# Altium PCB PCB.PcbDoc (part 2 of 2)
Units mm, origin at the board's own origin, x right, y up, seen from the top; angles counter-clockwise.
Board outline 100 x 50 mm, 4 copper layers (Top Layer, Vdd, GND, Bottom Layer), stack 0.603 mm thick; 115 components, 77 nets, 418 pads, 251 vias.
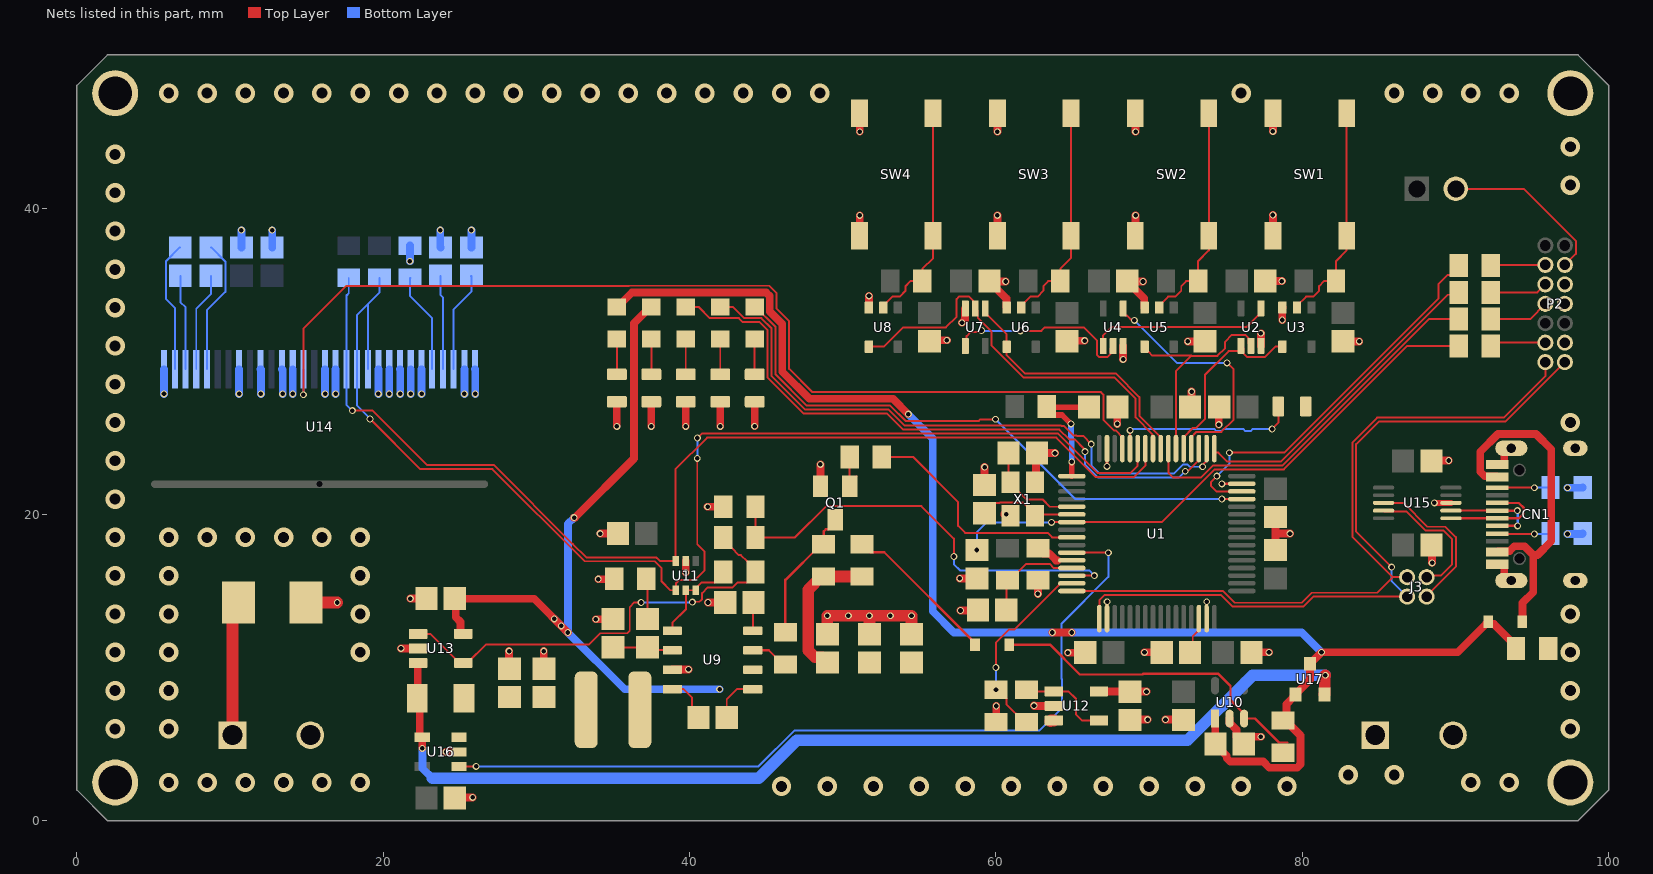
[diagram p4: the nets of this part, all layers, seen from the top]

## Via types
v1: diameter 0.45, hole 0.3, Top Layer to Bottom Layer, 169 vias
v2: diameter 1.27, hole 0.711, Top Layer to Bottom Layer, 82 vias

## Nets (pads, with @x,y where several pads share a name; then routed paths per layer and width w, separated by ;. In a path a pad name is that pad's centre, name@x,y a point inside that pad or via, vN(x,y) a via of type N, cw(c..) or ccw(c..) an arc to the next point about the centre after c; other vN are vias at no path point) (continued)
+12: C29.1 C30.1 C31.1 C41.1 C42.1 J2.1 LED3.2 R23.2 R37.1 U9.2 U12.3 U12.5 U13.5 U17.2 | length 59.9
  Top Layer w0.508: U13.5@25.225,12.2 25.116,12.2 25.045,12.271 25.045,12.978 24.738,13.286 24.738,14.437 C42.1@24.675,14.5 29.848,14.5 v1(32.055,12.294) ; v1(32.461,19.787) 32.512,19.787 36.373,23.647 36.373,32.473 37.45,33.55 LED3.2@37.5,33.55 ; U12.5@66.725,8.45 66.737,8.438 68.737,8.438 68.742,8.433 v1(69.825,8.433)
  Top Layer w0.762: C29.1@49,10.325 48.656,10.669 48.188,10.669 47.742,11.115 47.742,15.092 48.6,15.95 R23.2@48.75,15.95 R37.1@51.25,15.95 ; U12.3@63.556,6.494 63.612,6.55 U12.3@63.775,6.55
  Bottom Layer w0.508: v1(31.162,13.183) 31.166,13.183 v1(31.623,12.725) v1(32.055,12.294) ; v1(32.461,19.787) 32.055,19.38 v1(32.055,12.294) ; v1(41.961,8.585) 35.763,8.585 v1(32.055,12.294)
  other v2: 46,2.25 49,2.25 52,2.25 55,2.25 58,2.25 61,2.25 64,2.25 67,2.25 70,2.25 73,2.25 76,2.25 79,2.25 83,3 86,3
AGND: R7.1 U1.12 | length 1.6
  Top Layer w0.508: R7.1@62.75,17.8 63.096,17.454 63.47,17.454 63.924,17 64.021,17
CH_RX: J3.2 U15.9 | length 8.9
  Top Layer w0.127: U15.9@85.3,20.25 85.364,20.186 86.814,20.186 88.06,18.941 89.229,18.941 89.764,18.406 89.764,16.713 89.05,16 88.212,16 J3.2@88.113,15.9
CH_TX: J3.4 U15.8 | length 10.3
  Top Layer w0.127: U15.8@85.3,20.75 86.609,20.75 88.165,19.195 89.334,19.195 90.018,18.511 90.018,16.586 88.113,14.681 J3.4@88.113,14.63
D_N: CN1.A7 CN1.B7 U15.2 | length 6.7
  Top Layer w0.152: U15.2@89.7,20.25 CN1.A7@92.725,20.25 92.728,20.247 94.031,20.247 v1(94.034,20.244) ; CN1.B7@92.725,19.25 92.727,19.252 94.055,19.252 v1(94.056,19.253)
  Bottom Layer w0.152: v1(94.034,20.244) 94.056,20.222 v1(94.056,19.253)
D_P: CN1.A6 CN1.B6 U15.1 | length 7.1
  Top Layer w0.152: U15.1@89.7,19.75 CN1.A6@92.725,19.75 94.146,19.75 94.463,20.066 94.463,20.421 94.134,20.75 CN1.B6@92.725,20.75
GND: C1.2 C2.1 C3.1 C4.2 C5.1 C6.1 C7.1 C8.1 C9.1 C10.1 C11.1 C12.1 C13.2 C14.2 C15.2 C16.2 C17.2 C18.2 C19.2 C20.2 C21.1 C24.2 C25.2 C26.1 C27.1 C28.2 C29.2 C30.2 C31.2 C33.1 C34.1 C35.2 C37.2 C38.1 C39.1 C40.2 C41.2 C42.2 CN1.A1/B12 CN1.B1/A12 CN1.S1 CN1.S2 CN1.S3 CN1.S4 D2.2 J1.2 J2.2 P2.5 P2.7 P2.11 pad.2 Q1.2 R7.2 R14.2 R15.2 R16.2 R18.2 R20.1 R25.1 R27.1 R29.1 R30.1 R31.1 R32.1 R33.1 R34.1 SW1.1 SW1.3 SW2.1 SW2.3 SW3.1 SW3.3 SW4.1 SW4.3 U1.18 U1.31 U1.47 U1.63 U2.3 U3.3 U4.3 U5.3 U6.3 U7.3 U8.3 U9.7 U10.2 U11.2 U12.2 U13.2 U14.1 U14.8 U14.10 U14.12 U14.13 U14.16 U14.17 U14.21 U14.22 U14.23 U14.24 U14.25 U14.29 U14.30 U15.3 U16.2 X1.2 X1.4 | length 129.1
  Top Layer w0.178: v1(67.246,23.139) 67.248,23.141 67.248,24.298 U1.63@67.25,24.3 ; U1.18@67.25,13.2 67.255,13.205 67.255,14.296 v1(67.259,14.3) ; U1.31@73.75,13.2 73.756,13.206 73.756,14.294 v1(73.762,14.3) ; v1(74.752,21.996) 74.754,21.998 76.048,21.998 U1.47@76.05,22 ; v1(88.621,20.752) v1(88.621,20.752) ; U15.3@89.699,20.751 U15.3@89.7,20.75
  Top Layer w0.381: v1(88.621,20.752) U15.3@89.699,20.751
  Top Layer w0.508: v1(21.158,11.252) 21.16,11.25 U13.2@22.275,11.25 ; v1(21.768,14.503) 22.822,14.503 C42.2@22.825,14.5 ; v1(24.105,4.496) 24.895,4.496 24.92,4.47 U16.2@24.95,4.5 ; C28.2@24.675,1.5 24.699,1.524 v1(25.832,1.524) ; v1(28.219,11.074) 28.219,10.396 28.179,10.356 27.794,10.356 28.225,9.925 C33.1@28.25,9.925 ; v1(30.48,11.074) 30.48,9.945 C34.1@30.5,9.925 ; v1(33.884,13.157) 34.982,13.157 C37.2@35,13.175 ; v1(34.036,15.773) 35.048,15.773 R18.2@35.075,15.8 ; v1(34.163,18.745) 35.32,18.745 C40.2@35.325,18.75 ; v1(35.25,25.75) R32.1@35.25,27.35 ; v1(37.5,25.75) R31.1@37.5,27.35 ; U9.7@38.875,9.865 38.891,9.881 v1(39.929,9.881) ; U11.2@39.75,16.95 U11.2@39.75,16.95 v1(39.751,16.205) ; v1(39.75,25.75) R29.1@39.75,27.35 ; v1(41.173,20.498) 42.198,20.498 R25.1@42.2,20.5 ; v1(41.199,14.249) C35.2@42.325,14.25 ; v1(42,25.75) R30.1@42,27.35 ; v1(44.247,25.756) 44.25,25.759 R34.1@44.25,27.35 ; v1(48.539,23.266) 48.55,23.256 Q1.2@48.55,21.85 ; SW4.1@51.095,38.201 51.105,38.211 v1(51.105,39.522) ; SW4.3@51.095,46.201 51.105,46.191 v1(51.105,44.983) ; U8.3@51.7,33.5 51.714,33.514 v1(51.714,34.265) ; C16.2@55.65,31.3 55.719,31.369 v1(56.794,31.369) ; v1(57.633,15.824) C1.2@58.75,15.825 ; v1(57.683,13.725) 58.8,13.725 C11.1@58.825,13.75 ; v1(57.785,32.512) 57.971,32.698 57.971,33.421 U7.3@58,33.45 ; C2.1@59.25,21.925 59.258,21.933 v1(59.258,23.089) ; R20.1@60,6.45 60.02,6.47 v1(60.02,7.493) ; SW3.1@60.096,38.211 v1(60.096,39.522) ; v1(60.096,44.983) SW3.3@60.096,46.191 ; v1(60.63,35.204) 59.596,35.204 59.596,35.179 60.679,34.096 60.679,33.521 U6.3@60.7,33.5 ; X1.2@60.935,19.885 X1.2@60.95,19.9 ; v1(62.484,7.518) 62.502,7.5 U12.2@63.775,7.5 ; X1.4@62.55,22.1 62.613,22.163 62.613,23.938 C3.1@62.675,24 62.678,24.003 v1(63.856,24.003) ; v1(62.738,14.808) 62.738,15.688 R7.2@62.75,15.7 ; C17.2@64.65,31.3 64.694,31.344 v1(65.786,31.344) ; v1(64.694,10.973) 65.798,10.973 C6.1@65.825,11 ; v1(67.92,25.908) 67.92,26.995 C12.1@67.925,27 ; v1(68.301,30.124) U4.3@68.301,30.999 ; C41.2@68.75,6.575 68.779,6.604 v1(69.901,6.604) ; SW2.1@69.113,38.211 v1(69.113,39.522) ; v1(69.113,44.983) SW2.3@69.113,46.191 ; v1(69.596,35.204) 68.596,35.204 C14.2@68.575,35.225 68.575,35.2 69.679,34.096 69.679,33.521 U5.3@69.7,33.5 ; v1(69.698,10.998) 70.823,10.998 C4.2@70.825,11 ; v1(71.069,6.604) 72.221,6.604 C39.1@72.25,6.575 ; v1(72.517,31.293) 73.643,31.293 C18.2@73.65,31.3 ; C7.1@72.675,27 72.771,27.096 v1(72.771,28.016) ; v1(74.549,25.857) 74.549,26.974 C10.1@74.575,27 ; U10.2@75.25,6.675 75.25,6.368 75.26,6.358 75.291,6.358 75.704,5.944 75.704,5.471 C38.1@76.175,5 76.175,5.015 76.646,5.486 v1(77.292,5.486) ; C5.1@76.675,11 76.677,10.998 v1(77.826,10.998) ; v1(77.292,31.826) 77.292,31.008 U2.3@77.3,31 ; C13.2@77.575,35.225 77.58,35.23 v1(78.664,35.23) ; SW1.1@78.08,38.236 v1(78.08,39.548) ; v1(78.08,45.009) SW1.3@78.08,46.217 ; C9.1@78.25,17.675 78.25,18.75 ; C8.1@78.25,19.825 78.25,18.75 ; v1(78.689,32.69) 78.689,33.489 U3.3@78.7,33.5 ; v1(79.197,18.745) 79.192,18.75 78.25,18.75 ; C19.2@82.65,31.3 82.657,31.293 v1(83.718,31.293) ; C25.2@88.425,18 88.468,17.957 v1(88.468,16.84) ; C24.2@88.425,23.5 88.445,23.52 v1(89.56,23.52) ; CN1.A1/B12@92.725,16.75 93.136,16.75 93.182,16.704 93.182,15.907 93.41,15.68 CN1.S2@93.64,15.68 ; CN1.B1/A12@92.725,23.25 93.136,23.25 93.182,23.296 93.182,24.093 93.41,24.32 CN1.S1@93.64,24.32
  Top Layer w0.762: D2.2@14.96,14.25 v1(17,14.25) ; C29.2@49,12.175 48.997,12.178 v1(48.997,13.386) v1(50.368,13.386) v1(51.74,13.386) ; C30.2@51.75,12.175 51.74,12.185 v1(51.74,13.386) ; C31.2@54.5,12.175 54.483,12.192 v1(54.483,13.386) v1(53.111,13.386) v1(51.74,13.386) ; v1(60.681,20.015) 60.835,20.015 X1.2@60.95,19.9
  Bottom Layer w0.508: v1(5.69,27.864) 5.69,29.471 U14.1@5.695,29.476 ; v1(10.592,27.864) 10.592,29.473 U14.8@10.595,29.476 ; v1(10.744,38.557) 10.744,37.431 C20.2@10.75,37.425 ; U14.10@11.995,29.476 12.014,29.457 v1(12.014,27.864) ; C21.1@12.751,37.426 v1(12.751,38.557) ; U14.12@13.395,29.476 13.437,29.434 v1(13.437,27.864) ; U14.13@14.095,29.476 14.097,29.474 v1(14.097,27.864) ; U14.16@16.195,29.476 16.205,29.466 v1(16.205,27.864) ; v1(16.891,27.864) 16.891,29.472 U14.17@16.895,29.476 ; v1(19.685,27.864) 19.685,29.466 U14.21@19.695,29.476 ; U14.22@20.395,29.476 20.396,29.475 v1(20.396,27.864) ; U14.23@21.095,29.476 21.107,29.464 v1(21.107,27.864) ; v1(21.742,36.525) 21.742,37.542 R14.2@21.75,37.55 ; v1(21.793,27.864) 21.793,29.474 U14.24@21.795,29.476 ; U14.25@22.495,29.476 22.504,29.467 v1(22.504,27.864) ; v1(23.724,38.557) 23.724,37.451 C27.1@23.75,37.425 ; U14.29@25.295,29.476 25.298,29.473 v1(25.298,27.864) ; C26.1@25.75,37.425 25.756,37.431 v1(25.756,38.557) ; U14.30@25.995,29.476 26.01,29.461 v1(26.01,27.864) ; v1(97.307,18.72) 98.27,18.72 R15.2@98.3,18.75 ; v1(97.307,21.742) 98.292,21.742 R16.2@98.3,21.75
  other v2: 6,2.5 8.5,2.5 11,2.5 13.5,2.5 16,2.5 18.5,2.5 91,2.5 93.5,2.5 2.5,6 6,6 97.5,6 2.5,8.5 6,8.5 97.5,8.5 2.5,11 6,11 18.5,11 97.5,11 2.5,13.5 6,13.5 18.5,13.5 97.5,13.5 2.5,16 6,16 18.5,16 2.5,18.5 6,18.5 8.5,18.5 11,18.5 13.5,18.5 16,18.5 18.5,18.5 2.5,21 2.5,23.5 2.5,26 97.5,26 2.5,28.5 2.5,31 2.5,33.5 2.5,36 2.5,38.5 2.5,41 97.5,41.5 2.5,43.5 97.5,44 6,47.5 8.5,47.5 11,47.5 13.5,47.5 16,47.5 18.5,47.5 21,47.5 23.5,47.5 26,47.5 28.5,47.5 31,47.5 33.5,47.5 36,47.5 38.5,47.5 41,47.5 43.5,47.5 46,47.5 48.5,47.5 76,47.5 86,47.5 88.5,47.5 91,47.5 93.5,47.5
NetC4_1: C4.1 U1.30 | length 2.4
  Top Layer w0.127: C4.1@72.675,11 72.847,11.172 72.847,12.047 73.25,12.45 U1.30@73.25,13.2
NetC22_1: C22.1 U14.2 | length 8.6
  Bottom Layer w0.127: U14.2@6.395,29.476 6.395,33.483 5.809,34.069 5.809,36.51 6.725,37.425 C22.1@6.75,37.425
NetC22_2: C22.2 U14.3 | length 6.2
  Bottom Layer w0.127: C22.2@6.75,35.575 6.756,35.569 6.756,33.858 7.095,33.52 U14.3@7.095,29.476
NetC23_1: C23.1 U14.4 | length 6.5
  Bottom Layer w0.127: U14.4@7.795,29.476 7.795,33.424 8.75,34.379 C23.1@8.75,35.575
NetC23_2: C23.2 U14.5 | length 8.8
  Bottom Layer w0.127: U14.5@8.495,29.476 8.495,33.336 9.69,34.532 9.69,36.51 8.775,37.425 C23.2@8.75,37.425
NetC26_2: C26.2 U14.28 | length 6.6
  Bottom Layer w0.127: U14.28@24.595,29.476 24.595,33.383 25.756,34.544 25.756,35.53 25.73,35.555 C26.2@25.75,35.575
NetC27_2: C27.2 U14.27 | length 6.2
  Bottom Layer w0.127: C27.2@23.75,35.575 C27.2@23.75,35.575 23.749,34.315 23.895,34.169 U14.27@23.895,29.476
NetC32_1: C32.1 U9.1 | length 3.2
  Top Layer w0.127: C32.1@42.425,6.75 42.425,7.932 43.088,8.595 U9.1@44.125,8.595
NetC32_2: C32.2 L1.1 U9.8 | length 3
  Top Layer w0.127: U9.8@38.875,8.595 38.877,8.593 39.616,8.593 40.154,8.055 40.154,7.171 C32.2@40.575,6.75
NetC33_2: C33.2 C34.2 L1.2 R17.2 U16.3
NetC35_1: C35.1 U9.4 | length 1.9
  Top Layer w0.127: U9.4@44.125,12.405 44.125,14.2 C35.1@44.175,14.25
NetC36_1: C36.1 C37.1 U9.6 | length 4
  Top Layer w0.127: C37.1@35,11.325 C36.1@37.25,11.325 37.44,11.135 U9.6@38.875,11.135
NetC36_2: C36.2 R18.1 | length 2.7
  Top Layer w0.127: R18.1@37.175,15.8 37.25,15.725 C36.2@37.25,13.175
NetC38_2: C38.2 D1.1 LED4.2 R27.2 R28.1 U10.1 U17.1 U17.3 | length 96.5
  Top Layer w0.508: LED4.2@35.25,33.55 35.3,33.55 36.231,34.481 43.492,34.481 45.008,34.481 45.231,34.258 45.231,33.248 46.053,32.426 46.053,29.319 47.824,27.547 53.276,27.547 v1(54.28,26.543) ; v1(63.678,12.294) v1(64.948,12.294) ; U10.1@74.3,6.675 74.311,6.664 74.311,4.989 75.069,4.231 75.069,4.092 75.292,3.869 77.442,3.869 77.842,3.469 79.658,3.469 79.881,3.692 79.881,5.569 78.9,6.55 R28.1@78.75,6.55 78.964,6.764 78.964,7.614 79.404,8.054 79.404,8.154 79.696,8.446 79.746,8.446 80.5,9.2 80.5,10.3 80.646,10.446 80.696,10.446 v1(81.25,11) 90.135,11 91.974,12.839 92.074,12.839 D1.1@92.135,12.9 ; D1.1@92.135,13 D1.1@92.135,12.9 ; R27.2@93.95,11.25 93.95,11.4 92.511,12.839 92.196,12.839 D1.1@92.135,12.9
  Bottom Layer w0.508: v1(54.28,26.543) 55.867,24.956 55.867,13.678 57.252,12.294 v1(63.678,12.294) ; v1(64.948,12.294) 79.956,12.294 v1(81.25,11)
NetCN1_A4/B9: CN1.A4/B9 CN1.B4/A9 D1.2 | length 23
  Top Layer w0.508: CN1.A4/B9@92.725,17.55 92.771,17.596 93.516,17.596 93.836,17.916 94.504,17.916 95.071,17.349 ; CN1.B4/A9@92.725,22.45 92.679,22.496 91.915,22.496 91.619,22.792 91.619,24.095 92.774,25.25 95.25,25.25 96.25,24.25 96.25,18.25 95.349,17.349 95.071,17.349 ; D1.2@94.365,13 94.365,14.219 95.071,14.925 95.071,17.349
NetCN1_A5: CN1.A5 R15.1 | length 3.5
  Top Layer w0.127: CN1.A5@92.725,18.75 92.74,18.735 95.133,18.735 v1(95.148,18.72)
  Bottom Layer w0.127: v1(95.148,18.72) 96.17,18.72 R15.1@96.2,18.75
NetCN1_B5: CN1.B5 R16.1 | length 3.5
  Top Layer w0.127: CN1.B5@92.725,21.75 92.729,21.746 95.145,21.746 v1(95.148,21.742)
  Bottom Layer w0.127: v1(95.148,21.742) 96.192,21.742 R16.1@96.2,21.75
NetD3_1: D3.1 R28.2 U10.3 | length 21.6
  Top Layer w0.152: D3.1@60.865,11.5 63.52,11.5 65.47,9.55 69.571,9.55 69.627,9.606 74.494,9.606 75.311,8.789 75.311,7.877 76.2,6.988 U10.3@76.2,6.675 76.912,6.675 78.482,5.105 79.019,5.105
NetD3_2: D3.2 R37.2 | length 10.2
  Top Layer w0.152: R37.2@51.25,18.05 51.774,17.526 52.709,17.526 58.635,11.6 D3.2@58.635,11.5
NetLED1_1: LED1.1 R29.2 | length 2.3
  Top Layer w0.127: R29.2@39.75,29.14 LED1.1@39.75,31.45
NetLED2_1: LED2.1 R30.2 | length 2.3
  Top Layer w0.127: R30.2@42,29.14 LED2.1@42,31.45
NetLED3_1: LED3.1 R31.2 | length 2.3
  Top Layer w0.127: R31.2@37.5,29.14 LED3.1@37.5,31.45
NetLED4_1: LED4.1 R32.2 | length 2.3
  Top Layer w0.127: R32.2@35.25,29.14 LED4.1@35.25,31.45
NetLED5_1: LED5.1 R34.2 | length 2.3
  Top Layer w0.127: R34.2@44.25,29.14 LED5.1@44.25,31.45
NetP1_2: P1.2 P2.3 | length 11.1
  Top Layer w0.127: P1.2@90.02,41.25 94.457,41.25 97.851,37.856 97.851,37.006 P2.3@97.135,36.29
  Bottom Layer w0.127: P1.2@90.02,41.25 P1.2@90.028,41.25
NetP2_4: P2.4 R1.1 | length 3.6
  Top Layer w0.127: R1.1@92.3,36.25 92.34,36.29 P2.4@95.865,36.29
NetP2_6: P2.6 R2.1 | length 3.8
  Top Layer w0.127: R2.1@92.3,34.5 95.345,34.5 P2.6@95.865,35.02
NetP2_8: P2.8 R3.1 | length 4
  Top Layer w0.127: R3.1@92.3,32.75 94.865,32.75 P2.8@95.865,33.75
NetP2_12: P2.12 R4.1 | length 3.7
  Top Layer w0.127: R4.1@92.3,31 92.51,31.21 P2.12@95.865,31.21
NetQ1_1: Q1.1 R26.2 | length 2.5
  Top Layer w0.127: Q1.1@50.45,21.85 Q1.1@50.45,22.05 ; R26.2@50.45,23.75 Q1.1@50.45,22.05 ; Q1.1@50.887,22.487 Q1.1@50.45,22.05
NetQ1_3: Q1.3 R23.1 R35.1 | length 8.9
  Top Layer w0.152: R35.1@46.25,12.3 46.25,15.75 46.3,15.75 48.6,18.05 R23.1@48.75,18.05 48.75,18.879 48.898,19.026 49.076,19.026 49.5,19.45 Q1.3@49.5,19.65
NetR8_1: R8.1 SW1.2 SW1.4 U3.2 | length 14.8
  Top Layer w0.127: U3.2@79.65,33.5 79.65,33.625 80.243,34.218 80.713,34.218 81.094,34.6 81.094,34.91 81.41,35.225 R8.1@82.2,35.225 82.2,36.543 82.895,37.238 SW1.2@82.895,38.201 SW1.4@82.895,46.201
NetR9_1: R9.1 SW2.2 SW2.4 U5.2 | length 14.8
  Top Layer w0.127: U5.2@70.65,33.5 70.65,33.625 71.243,34.218 71.713,34.218 72.094,34.6 72.094,34.91 72.41,35.225 R9.1@73.2,35.225 73.2,36.543 73.895,37.238 SW2.2@73.895,38.201 SW2.4@73.895,46.201
NetR10_1: R10.1 SW3.2 SW3.4 U6.2 | length 14.8
  Top Layer w0.127: U6.2@61.65,33.5 61.65,33.625 62.243,34.218 62.713,34.218 63.094,34.6 63.094,34.91 63.41,35.225 R10.1@64.2,35.225 64.2,36.038 64.895,36.733 SW3.2@64.895,38.201 SW3.4@64.895,46.201
NetR11_1: R11.1 SW4.2 SW4.4 U8.2 | length 14.8
  Top Layer w0.127: U8.2@52.65,33.5 52.65,33.625 53.243,34.218 53.713,34.218 54.094,34.6 54.094,34.91 54.41,35.225 R11.1@55.2,35.225 55.2,36.038 55.895,36.733 SW4.2@55.895,38.201 SW4.4@55.895,46.201
NetR14_1: R14.1 U14.26 | length 6.6
  Bottom Layer w0.127: R14.1@21.768,35.432 R14.1@21.75,35.45 21.75,34.257 23.195,32.812 U14.26@23.195,29.476
NetR19_1: R19.1 U12.1 U12.4 | length 6.1
  Top Layer w0.127: R19.1@62,8.55 62.1,8.45 U12.1@63.775,8.45 64.05,8.45 64.727,8.45 65.227,7.95 65.227,6.934 65.611,6.55 U12.4@66.725,6.55
NetR21_1: R21.1 R22.1 U13.1 U13.4 | length 29.7
  Top Layer w0.127: U13.1@22.275,12.2 23.081,12.2 24.688,10.592 24.688,10.562 24.95,10.3 U13.4@25.225,10.3 25.5,10.3 26.719,11.519 33.449,11.519 34.173,12.243 35.941,12.243 36.093,12.395 36.093,13.947 36.398,14.252 v1(36.834,14.252) ; v1(40.183,14.275) 40.208,14.3 40.642,14.3 40.716,14.375 40.716,14.376 40.817,14.477 40.817,14.858 41.199,15.24 42.809,15.24 43.133,15.563 43.763,15.563 44.3,16.1 R21.1@44.3,16.25 44.3,16.4 43.763,16.937 43.762,16.937 43.35,17.348 43.206,17.348 42.74,17.814 42.736,17.814 42.2,18.35 R22.1@42.2,18.5
  Bottom Layer w0.127: v1(36.834,14.252) 36.846,14.263 40.171,14.263 v1(40.183,14.275)
NetR33_2: R33.2 U1.60 | length 12.4
  Top Layer w0.127: U1.60@68.75,24.3 68.753,24.303 68.753,25.485 v1(68.757,25.488) ; v1(78.029,25.578) 78.434,25.983 R33.2@78.434,27.051
  Bottom Layer w0.127: v1(68.757,25.488) 68.847,25.578 74.241,25.578 74.377,25.442 74.721,25.442 74.857,25.578 76.146,25.578 76.282,25.442 76.626,25.442 76.762,25.578 v1(78.029,25.578)
NetU2_4: U2.4 U4.1 | length 11.9
  Top Layer w0.127: U4.1@67,31 67,31.684 67.551,32.234 76.381,32.234 77.135,32.988 77.139,32.988 77.3,33.15 U2.4@77.3,33.45
NetU4_2: U4.2 U7.4 | length 12.4
  Top Layer w0.127: U7.4@58,31 58.083,31.082 58.083,31.641 58.355,31.913 58.964,31.913 v1(59.055,32.004) ; v1(61.595,31.979) 62.962,31.979 63.199,32.215 65.738,32.215 66.584,31.369 66.584,30.425 66.725,30.284 67.295,30.284 67.489,30.478 67.489,30.838 U4.2@67.65,31
  Bottom Layer w0.127: v1(59.055,32.004) 59.08,31.979 v1(61.595,31.979)
NRST: C1.1 R4.2 U1.7 | length 37.7
  Top Layer w0.127: v1(63.627,19.482) 63.636,19.491 64.941,19.491 U1.7@64.95,19.5 70.833,19.5 74.006,22.673 74.006,22.677 74.25,22.92 74.253,22.92 74.27,22.936 78.798,22.936 86.862,31 R4.2@90.2,31
  Bottom Layer w0.127: v1(58.75,17.675) 58.75,18.847 59.385,19.482 v1(63.627,19.482)
PA0: R22.2 R25.2 U1.14 | length 29.3
  Top Layer w0.127: R25.2@44.3,20.5 R22.2@44.3,18.5 46.881,18.5 48.921,20.54 55.129,20.54 57.25,18.419 v1(57.25,17.25) ; U1.14@64.95,16 64.951,16.001 v1(66.421,16.002) v1(66.421,16.002)
  Bottom Layer w0.127: v1(57.25,17.25) 57.25,16.75 57.652,16.348 66.075,16.348 v1(66.421,16.002)
PA1: R19.2 R20.2 U1.15 | length 12.7
  Top Layer w0.127: v1(59.995,10.005) 59.995,11.629 60.866,12.5 61.217,12.5 64.217,15.5 U1.15@64.95,15.5 ; v1(60,8.55) 60.15,8.55 60.687,8.013 60.687,7.613 61.85,6.45 R19.2@62,6.45
  Bottom Layer w0.127: v1(59.995,10.005) 59.997,10.003 59.997,8.553 v1(60,8.55)
PA2: J3.1 P2.14 U1.16 | length 48.1
  Top Layer w0.127: U1.16@64.95,15 64.961,15.011 74.807,15.011 75.584,14.234 79.964,14.234 80.614,14.884 84.883,14.884 85.899,15.9 ; J3.1@86.843,15.9 85.899,15.9 ; P2.14@95.865,29.94 95.865,29.029 93.15,26.314 84.883,26.314 83.261,24.692 83.261,18.539 85.411,16.389 85.899,15.9
PA3: J3.3 P2.13 U1.17 | length 49.2
  Top Layer w0.127: U1.17@66.75,13.2 66.75,14.401 67.081,14.732 74.701,14.732 75.453,13.98 80.069,13.98 80.72,14.63 J3.3@86.843,14.63 ; v1(85.827,16.561) 83.515,18.872 83.515,24.587 84.988,26.06 93.255,26.06 P2.13@97.135,29.94
  Bottom Layer w0.127: v1(85.827,16.561) 85.827,15.646 J3.3@86.843,14.63
PA12: LED5.2 U1.45 | length 38.9
  Top Layer w0.127: LED5.2@44.25,33.55 44.3,33.55 45.608,32.242 45.608,29.135 47.64,27.103 48.208,27.103 48.209,27.102 53.092,27.102 54.096,26.098 58.864,26.098 58.975,26.209 v1(59.969,26.209) ; v1(74.752,21.006) 74.755,21.003 76.047,21.003 U1.45@76.05,21
  Bottom Layer w0.127: v1(59.969,26.209) 65.173,21.006 v1(74.752,21.006)
PA13: R1.2 U1.46 | length 25.5
  Top Layer w0.127: v1(74.422,22.504) 74.041,22.123 74.041,21.844 74.385,21.5 U1.46@76.05,21.5 ; v1(75.235,24.028) 78.813,24.028 88.9,34.116 88.9,35.052 89.484,35.636 89.663,35.636 90.2,36.172 R1.2@90.2,36.25
  Bottom Layer w0.127: v1(74.422,22.504) 75.235,23.317 v1(75.235,24.028)
PA14: R2.2 U1.49 | length 21
  Top Layer w0.127: U1.49@74.25,24.3 74.25,24.114 74.33,24.034 74.516,24.034 75.106,23.444 78.588,23.444 89.484,34.34 90.04,34.34 R2.2@90.2,34.5
PA15: LED2.2 U1.50 | length 40.2
  Top Layer w0.127: LED2.2@42,33.55 42.831,33.55 43.571,32.81 44.681,32.81 45.354,32.137 45.354,29.03 47.536,26.848 52.987,26.848 54.041,25.794 64.249,25.794 64.262,25.781 64.436,25.781 65.071,25.146 65.256,25.146 65.282,25.121 65.686,25.121 v1(66.221,24.585) ; v1(73.495,23.112) 73.557,23.174 73.557,23.31 73.75,23.503 U1.50@73.75,24.3
  Bottom Layer w0.127: v1(66.221,24.585) 66.225,24.582 66.225,23.212 66.78,22.657 71.61,22.657 72.203,23.25 72.515,23.25 72.653,23.112 v1(73.495,23.112)
PB3: R3.2 U1.55 | length 24.9
  Top Layer w0.127: U1.55@71.25,24.3 71.25,22.73 71.577,22.403 73.377,22.403 73.752,22.778 73.752,22.782 74.161,23.19 78.693,23.19 88.253,32.75 R3.2@90.2,32.75
PB4: U1.56 U6.4 U7.1 | length 17.4
  Top Layer w0.127: U7.1@59.3,33.45 59.3,33.15 59.462,32.988 59.468,32.988 60.7,31.756 U6.4@60.7,30.95 60.7,30.394 61.909,29.185 67.844,29.185 69.367,27.661 69.367,26.433 70.75,25.05 U1.56@70.75,24.3
PB5: U1.57 U7.2 U8.4 | length 26.9
  Top Layer w0.127: U8.4@51.7,30.95 52.685,30.95 53.95,32.215 56.726,32.215 57.429,32.918 57.429,34.061 57.582,34.214 58.242,34.214 58.489,33.967 58.489,33.611 U7.2@58.65,33.45 58.812,33.288 58.812,32.835 59.716,31.931 59.716,31.019 61.804,28.931 67.739,28.931 69.113,27.556 69.113,26.327 70.217,25.224 70.217,24.333 U1.57@70.25,24.3
PB6: R13.1 U1.58 U11.3 U14.18 | length 74.1
  Top Layer w0.127: v1(17.983,26.772) 19.308,26.772 22.864,23.216 27.232,23.216 32.385,18.063 33.252,17.196 37.821,17.196 37.871,17.145 37.875,17.145 38.07,16.95 U11.3@39.1,16.95 39.065,16.985 39.065,22.936 41.148,25.019 63.946,25.019 66.524,22.441 68.999,22.441 69.75,23.192 U1.58@69.75,24.3
  Bottom Layer w0.127: R13.1@17.75,35.45 17.75,34.438 17.602,34.29 17.602,29.483 U14.18@17.595,29.476 17.595,27.16 v1(17.983,26.772)
PB7: R12.1 U1.59 U11.4 U14.19 U14.20 | length 82.3
  Top Layer w0.127: v1(19.139,26.229) 19.161,26.229 22.428,22.962 27.127,22.962 33.147,16.942 37.719,16.942 38.176,16.485 38.176,15.621 38.747,15.05 U11.4@39.1,15.05 39.113,15.063 39.113,15.491 39.332,15.71 40.322,15.71 40.983,16.37 40.983,17.564 40.5,18.047 v1(40.5,23.66) ; v1(40.505,24.986) 40.519,24.986 40.806,25.273 64.051,25.273 66.629,22.695 68.757,22.695 69.25,23.188 U1.59@69.25,24.3
  Bottom Layer w0.127: U14.20@18.995,29.476 18.995,33.727 ; v1(19.139,26.229) 19.139,26.251 18.295,27.095 U14.19@18.295,29.476 18.295,33.027 18.995,33.727 ; R12.1@19.75,35.45 19.75,34.482 18.995,33.727 ; v1(40.5,23.66) 40.503,23.663 40.503,24.983 v1(40.505,24.986)
PB8: U1.61 U14.14 | length 68.8
  Top Layer w0.127: v1(14.783,27.813) 14.783,32.131 17.577,34.925 36.046,34.925 43.308,34.926 45.192,34.926 45.676,34.442 45.676,33.432 46.497,32.61 46.497,29.503 48.008,27.992 55.268,27.992 66.828,27.992 67.005,27.815 67.005,26.175 67.717,25.463 67.837,25.463 68.25,25.05 U1.61@68.25,24.3
  Bottom Layer w0.127: v1(14.783,27.813) 14.795,27.825 U14.14@14.795,29.476
PC1: R26.1 U1.9 | length 15.5
  Top Layer w0.127: R26.1@52.55,23.75 54.584,23.75 57.531,20.803 57.531,19.253 57.988,18.796 63.373,18.796 63.669,18.5 U1.9@64.95,18.5
PC3: U1.11 U16.1 | length 54.7
  Top Layer w0.127: U16.1@24.95,3.55 26.054,3.55 v1(26.06,3.556) ; U1.11@64.95,17.5 v1(67.335,17.501)
  Bottom Layer w0.127: v1(26.06,3.556) 44.498,3.556 46.835,5.893 62.84,5.893 64.313,7.366 64.313,9.238 64.278,9.273 64.278,12.869 67.335,15.926 v1(67.335,17.501)
PC10: LED1.2 U1.51 | length 41.7
  Top Layer w0.127: LED1.2@39.75,33.55 40.581,33.55 41.321,32.81 43.212,32.81 43.466,32.556 44.576,32.556 45.1,32.032 45.1,28.924 47.431,26.594 52.882,26.594 53.936,25.54 64.144,25.54 64.792,24.892 65.151,24.892 65.708,24.335 65.708,24.291 65.809,24.19 v1(65.809,24.102) ; v1(72.359,22.818) 72.421,22.88 72.58,22.88 73.25,23.55 U1.51@73.25,24.3
  Bottom Layer w0.127: v1(65.809,24.102) 65.809,23.269 66.675,22.403 71.944,22.403 v1(72.359,22.818)
PC11: U1.52 U4.4 | length 16.3
  Top Layer w0.127: U4.4@68.3,33.45 68.3,33.15 68.462,32.988 68.534,32.988 68.796,32.726 68.975,32.726 v1(69.037,32.664) ; U1.52@72.75,24.3 72.75,25.05 73.091,25.391 74.711,25.391 75.509,26.189 75.509,29.469 v1(75.082,29.896)
  Bottom Layer w0.127: v1(69.037,32.664) 71.806,29.896 v1(75.082,29.896)
PC12: U1.53 U2.1 U3.4 | length 12.2
  Top Layer w0.127: U1.53@72.25,24.3 72.25,25.032 72.863,25.645 73.064,25.645 73.659,26.24 73.659,29.133 75.185,30.659 75.839,30.659 76,30.82 U2.1@76,31 76.162,30.838 76.162,30.498 76.375,30.284 77.575,30.284 77.905,30.614 77.905,30.62 78.235,30.95 U3.4@78.7,30.95
PD2: U1.54 U2.2 U5.4 | length 15
  Top Layer w0.127: U5.4@69.7,30.95 69.7,30.825 69.912,30.613 69.961,30.613 70.215,30.359 72.751,30.359 72.758,30.353 ; U1.54@71.75,24.3 71.75,29.345 72.758,30.353 ; U2.2@76.65,31 76.489,31.161 76.489,31.502 76.275,31.715 75.402,31.715 74.955,31.269 74.955,30.861 74.447,30.353 72.758,30.353
PWR_FB: R21.2 U9.5 U11.5 U11.6 | length 6.1
  Top Layer w0.127: U9.5@38.875,12.405 38.875,12.916 39.751,13.792 U11.5@39.75,15.05 U11.5@39.75,15.05 U11.6@40.4,15.05 40.4,15.175 40.788,15.563 41.663,15.563 42.2,16.1 R21.2@42.2,16.25
TPS_REG_EN: R35.2 U9.3 | length 2.5
  Top Layer w0.152: U9.3@44.125,11.135 45.165,11.135 46.1,10.2 R35.2@46.25,10.2
Vbat: C12.2 R5.2 U1.1 | length 8
  Top Layer w0.381: R5.2@63.323,27.051 63.323,26.901 63.732,26.492 64.313,26.492 v1(64.897,25.908) ; R5.2@63.645,27 C12.2@66.075,27 ; v1(64.948,23.429) 64.948,22.502 U1.1@64.95,22.5
  Bottom Layer w0.381: v1(64.897,25.908) 64.897,24.972 64.948,24.921 v1(64.948,23.429)
VCC: D2.1 J1.1 R17.1 U13.3 U16.4 | length 79.2
  Top Layer w0.508: U13.3@22.275,10.3 22.25,10.275 22.25,8.025 R17.1@22.225,8 22.388,7.837 22.388,5.496 22.434,5.45 U16.4@22.55,5.45 v1(22.55,4.73)
  Top Layer w0.762: J1.1@10.16,5.588 10.16,13.87 D2.1@10.54,14.25 ; 81.45,8.25 81.469,8.269 81.469,9.469 v1(81.5,9.5)
  Bottom Layer w0.508: v1(22.55,4.73) 22.555,4.724 22.555,3.429 23.216,2.769
  Bottom Layer w0.762: 23.216,2.769 44.519,2.769 47,5.25 72.5,5.25 76.75,9.5 v1(81.5,9.5)
Vref: C11.2 R6.2 U1.13 | length 6.7
  Top Layer w0.127: C11.2@60.675,13.75 60.675,15.55 60.825,15.7 60.9,15.7 61.977,16.777 63.5,16.777 63.777,16.5 U1.13@64.95,16.5
X1_1: C3.2 U1.5 X1.1 | length 6.7
  Top Layer w0.127: C3.2@60.825,24 60.825,22.125 61.968,20.982 63.038,20.982 63.519,20.5 U1.5@64.95,20.5
X1_2: C2.2 U1.6 X1.3 | length 6.4
  Top Layer w0.127: C2.2@59.25,20.075 59.912,20.737 60.217,20.737 60.271,20.791 61.76,20.791 62.6,19.95 62.65,20 U1.6@64.95,20
pads on no net: CN1.A8 CN1.B8 CN1.H1 CN1.H2 P2.1 P2.2 P2.9 P2.10 U1.2 U1.3 U1.4 U1.8 U1.10 U1.20 U1.21 U1.22 U1.23 U1.24 U1.25 U1.26 U1.27 U1.28 U1.29 U1.33 U1.34 U1.35 U1.36 U1.37 U1.38 U1.39 U1.40 U1.41 U1.42 U1.43 U1.44 U1.62 U3.5 U5.5 U6.5 U8.5 U10.4 U14.31 U15.4 U15.5 U15.6

## Polygon pours and split planes (outlines as drawn)
GND on Top Layer "GND_L01_P004" (solid, pour order 4): 2,50 98,50 100,48 100,2 98,0 2,0 0,2 0,48
no net on Top Layer "Vcc" (solid, pour order 8): 87,8 cw(c87,7.25) 87.75,7.25 87.75,2 cw(c86.75,2) 86.75,1 43.5,1 cw(c43.5,3) 41.5,3 41.5,10 cw(c43,10) 43,11.5 56,11.5 cw(c56,9.5) 58,9.5 58,6 ccw(c59,6) 59,5 81.5,5 82.25,5 ccw(c82.25,5.5) 82.75,5.5 82.75,7 cw(c83.75,7) 83.75,8 85.5,8
+12 on Top Layer "Vcc" (solid, pour order 3): 62,5 62.75,5.75 62.75,7 64.539,7 64.5,6.961 64.5,5.75 65.25,5 81.5,5 82.25,5 ccw(c82.25,5.5) 82.75,5.5 82.75,7 cw(c83.75,7) 83.75,8 85.5,8 87,8 cw(c87,7.25) 87.75,7.25 87.75,2 cw(c86.75,2) 86.75,1 43.5,1 cw(c43.5,3) 41.5,3 41.5,10 cw(c43,10) 43,11.5 56,11.5 cw(c56,9.5) 58,9.5 58,6 ccw(c59,6) 59,5
VCC on Top Layer "VCC_L01_P000" (solid, pour order 0): 11.098,3.51 11.107,3.5 11.75,3.5 ccw(c11.75,4) 12.25,4 12.25,6 cw(c12.75,6) 12.75,6.5 23,6.5 ccw(c23,7) 23.5,7 23.5,9 ccw(c23,9) 23,9.5 9.296,9.5 ccw(c9.296,8.204) 8,8.204 8,4 ccw(c8.5,4) 8.5,3.5 11,3.5 ccw(c11,4)
NetC33_2 on Top Layer "NETC33_2_L01_P001" (solid, pour order 1): 26.5,9.5 cw(c26.5,9) 27,9 31.5,9 ccw(c31.5,9.5) 32,9.5 32,10 cw(c32.5,10) 32.5,10.5 34,10.5 cw(c34,10) 34.5,10 34.5,5 cw(c33.5,5) 33.5,4 29.5,4 cw(c29.5,5) 28.5,5 24.5,5 cw(c24.5,5.5) 24,5.5 24,9 cw(c24.5,9) 24.5,9.5
NetC32_2 on Top Layer "NETC32_2_L01_P002" (solid, pour order 2): 38,9.25 ccw(c38.25,9.25) 38.25,9 40.5,9 cw(c40.5,8.5) 41,8.5 41,4.5 cw(c40.5,4.5) 40.5,4 36,4 cw(c35.999,4.499) 35.5,4.5 35.5,10 cw(c36,10) 36,10.5 37.5,10.5 cw(c37.501,10.001) 38,10
GND on Bottom Layer "GND_L04_P005" (solid, pour order 5): 0,48 2,50 98,50 100,48 100,2 98,0 2,0 0,2
GND on GND (split plane): 99.49,47.789 99.49,2.211 97.789,0.51 2.211,0.51 0.51,2.211 0.51,47.789 2.211,49.49 97.789,49.49
+3v3 on Vdd (split plane): 99.49,47.789 99.49,2.211 97.789,0.51 2.211,0.51 0.51,2.211 0.51,47.789 2.211,49.49 97.789,49.49
+12 on Vdd (split plane): 57.871,9.696 57.871,6 57.88,5.95 57.908,5.908 58.908,4.908 58.95,4.88 59,4.871 82.25,4.871 82.3,4.88 82.342,4.908 82.842,5.408 82.87,5.45 82.879,5.5 82.879,7.196 83.554,7.871 86.946,7.871 87.621,7.196 87.621,5.625 87.621,4.375 87.621,2.054 86.696,1.129 43.304,1.129 41.629,2.804 41.629,3 41.629,9.696 43.054,11.121 56.446,11.121

## Other copper
Vdd (plane layer: these items are gaps in the copper):
  lines w0.254: 41.5,2.75 41.5,3 41.5,9.75 43,11.25 56.5,11.25 58,9.75 58,6 59,5 82.25,5 82.75,5.5 82.75,7.25 83.5,8 87,8 87.75,7.25 87.75,5.625 87.75,4.375 87.75,2 86.75,1 43.25,1 41.5,2.75

## Silkscreen, mask and mechanical layers (free items; w line width, h text height)
Top Overlay:
  text "OE" at 52.23,47.504 h1.52
  text "UP" at 61.23,47.504 h1.52
  text "DW" at 70.23,47.504 h1.52
  text "V/I" at 78.723,47.504 h1.52
  text "ADSEHGAL" at 29.266,40.762 h2.54
  text "Power Supply Rev 1.1" at 27.99,38.385 h1.14
  text "github.com/adsehgal" at 28.562,35.885 h1.14
  text "USB  Vin  CC  OE   V!I" at 34.25,30.013 h1.2
  text "Vout" at 7.711,10.254 h1.52
  text "GND" at 13.469,10.254 h1.52
  text "Vin" at 82.846,10.254 h1.52
  text "GND" at 87.969,10.254 h1.52

## Text inside footprints (layer, text, board x,y; h text height)
P2: Top Overlay "2" at 96.1,39.425 h1.02 r90; Top Overlay "1" at 97.9,39.025 h1.02 r90; Top Overlay "14" at 96.1,28.775 h1.02 r90; Top Overlay "13" at 97.9,28.775 h1.02 r90